# Altium PCB PCB1.PcbDoc
Units mm, origin at the board's own origin, x right, y up, seen from the top; angles counter-clockwise.
Board outline 152.4 x 101.6 mm, 2 copper layers (Top Layer, Bottom Layer); 8 components, 7 nets, 24 pads, 0 vias.
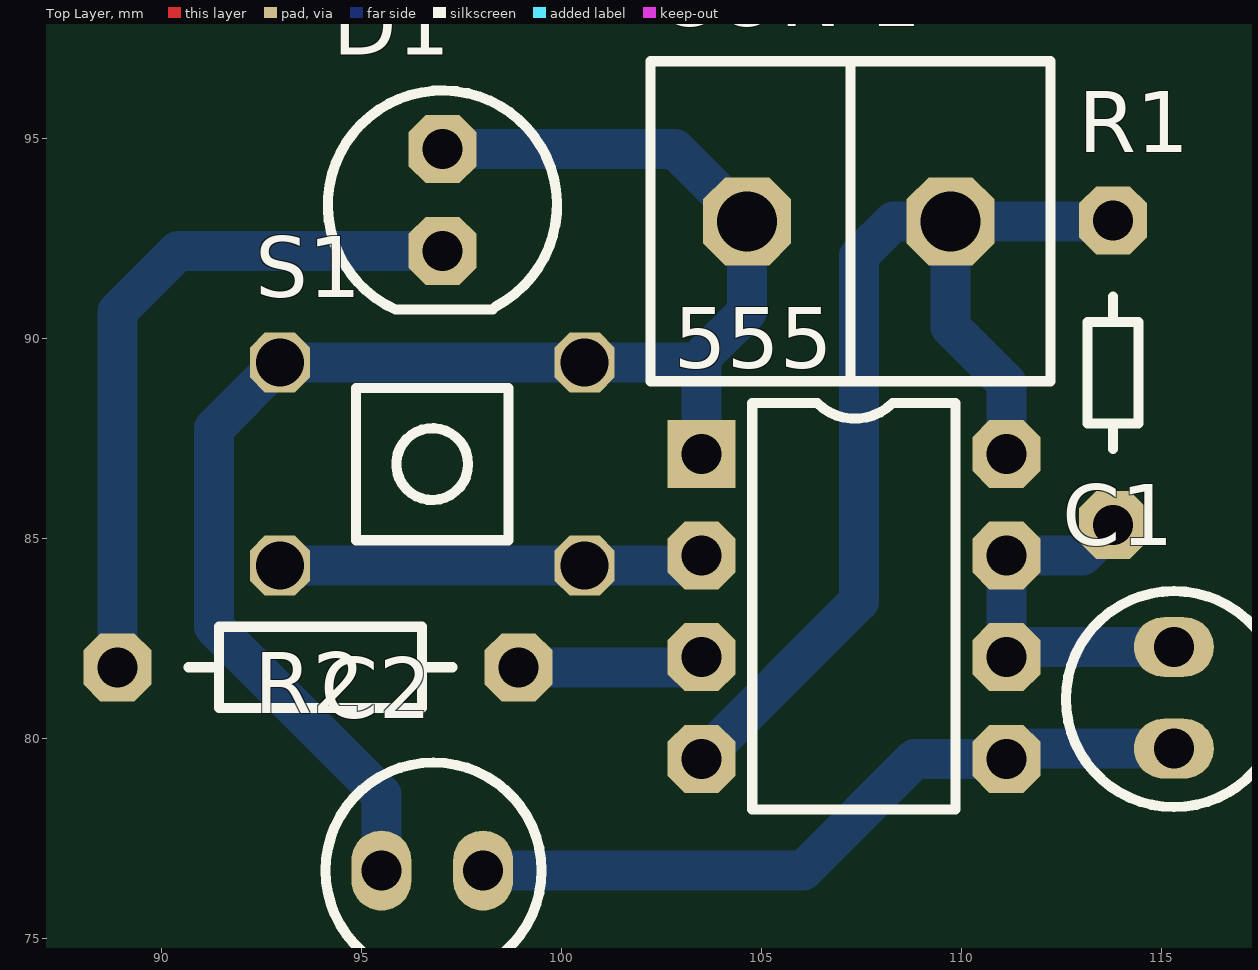
[diagram p0: Top Layer view]
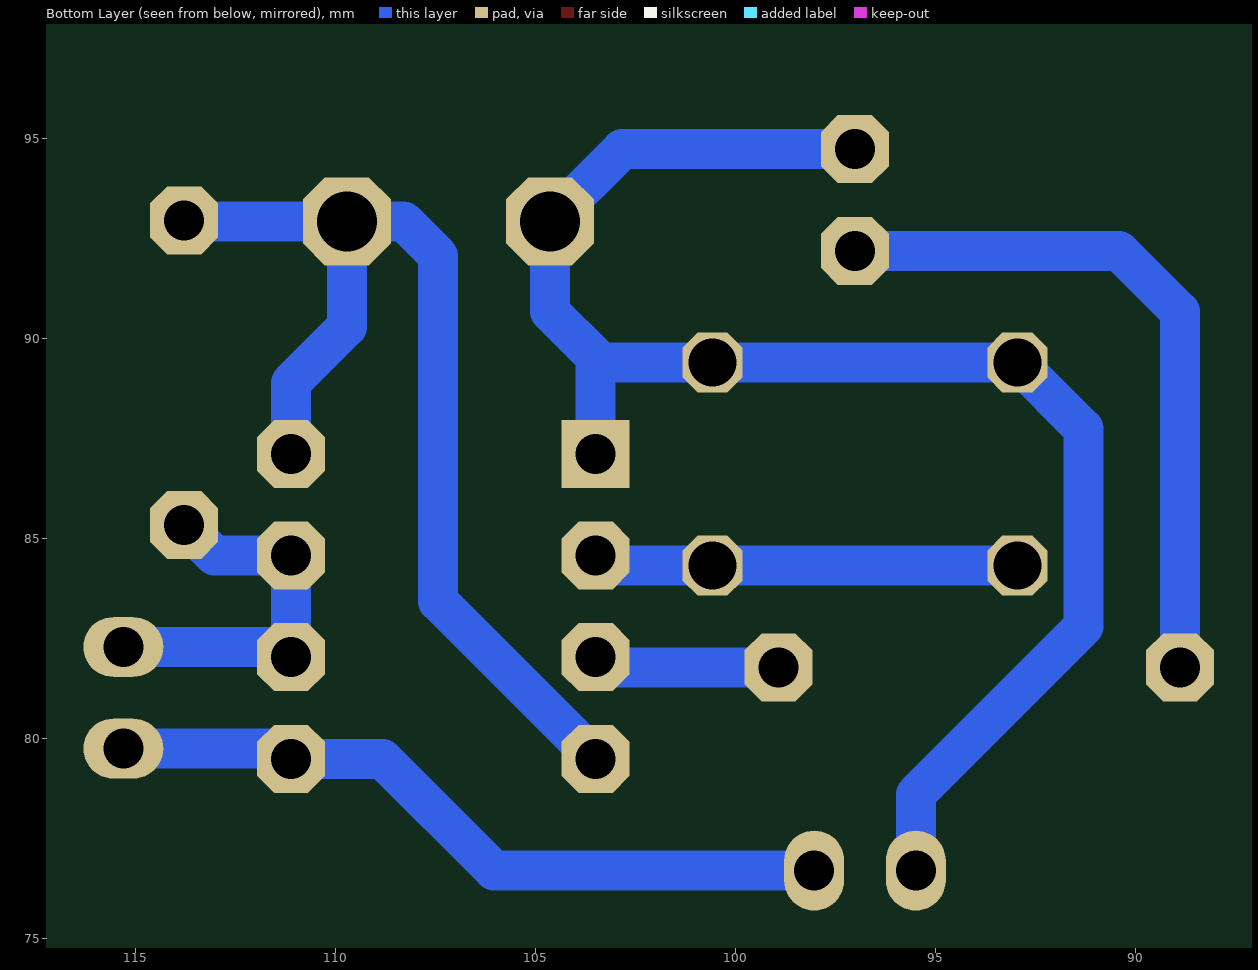
[diagram p1: Bottom Layer view, seen from below]

## Layer stack, top to bottom
Top Layer: signal copper 0.0356
Dielectric: dielectric 0.32, FR-4, Dk 4.8
Bottom Layer: signal copper 0.0356

## Board outline
25.4,25.4 177.8,25.4 177.8,127 25.4,127

## Design rules (kind name [scope] priority, off if disabled: settings)
Clearance [All] p1: gap=0.254
PolygonConnect [All] p1: connectstyle=Relief reliefconductorwidth=0.254 reliefentries=4 polygonreliefangle="90 Angle"
RoutingVias [All] p1: holewidth=0.711 width=1.27 viastyle="Through Hole" minholewidth=0.711 minwidth=1.27 maxholewidth=0.711 maxwidth=1.27
SilkscreenOverComponentPads [All] p1: minsilkscreentomaskgap=0.254
SolderMaskExpansion [All] p1: expansion=0.102
Width [All] p1: maxlimit=1 minlimit=1 preferedwidth=1
27 further rules are at their usual default settings.

## Components (designator, comment, footprint, x,y, rotation, side; value= is the part's Value field where it differs from the comment)
555 "dip-8pin" dip-8pin 103.505,87.122 r0 top
C1 "Cap" CAP 115.316,79.756 r90 top
C2 "Cap" CAP 98.044,76.708 r180 top
"CON 1" "Combicon 4pin" combicon-2pin_black 109.728,92.964 r270 top
D1 "LED-GREEN" LED-GREEN 97.028,93.472 r90 top
R1 "Resistor" res-2.54x4 113.792,85.344 r90 top
R2 "Resistor" res-2.54x5 88.9,81.788 r0 top
S1 "SW-PB" sw-pb 100.584,89.408 r270 top

## Footprints (in the part's own frame and the unit in brackets; to place one, negate y for a bottom-side part, rotate by r counter-clockwise, add the part's x,y. Pads: shape width x height; smd on the part's side, far side on the other; paste and mask are expansions set on the pad)
CAP [mm]
  oval 1.5x2 hole 1: 1(0,0) 2(2.54,0)
  silkscreen extent -1.46,-2.7 3.94,2.7, body extent -1.75,-3.04 4.32,3.04, height 7.01
combicon-2pin_black [mm]
  oct 2.2x2.2 hole 1.5: 1(0.025,0) 2(0.025,-5.08)
  silkscreen extent -3.97,-7.5 4.03,2.5, body extent -3.91,-7.51 3.98,2.41, height 12.9
dip-8pin [mm]
  rect 1.7x1.7 hole 1: 1(0,0)
  oct 1.7x1.7 hole 1: 2(0,-2.54) 3(0,-5.08) 4(0,-7.62) 5(7.62,-7.62) 6(7.62,-5.08) 7(7.62,-2.54) 8(7.62,0)
  silkscreen extent 1.27,-8.89 6.35,1.27, body extent -0.13,-8.89 7.75,1.27, height 2.51
LED-GREEN [mm]
  oct 1.7x1.7 hole 1: 1(-1.27,0) 2(1.27,0)
  silkscreen extent -2.74,-2.86 2.74,2.86, body extent -2.91,-2.67 2.67,2.92, height 9
res-2.54x4 [mm]
  oct 1.7x1.7 hole 1: 1(0,0) 2(7.62,0)
  silkscreen extent 1.91,-0.63 5.71,0.64, body extent -0.51,-1.1 8.11,1.11, height 3.1
res-2.54x5 [mm]
  oct 1.7x1.7 hole 1: 1(0,0) 2(10.033,0)
  silkscreen extent 1.78,-1.02 8.38,1.02, body extent -0.51,-1 10.53,1, height 3
sw-pb [mm]
  oct 1.5x1.5 hole 1.2: 1(0,0) 1(0,-7.62) 2(5.08,0) 2(5.08,-7.62)
  silkscreen extent 0.64,-5.71 4.45,-1.9, body extent -0.76,-8.38 5.84,0.76, height 5.5

## Part data
C1 C2: "Capacitor"
"CON 1": library part "Combicon - 2 pin_black"
D1: "Typical RED GaAs LED"
R1: library part "Resistor 2.54x4"
R2: library part "Resistor 2.54x5"
S1: "Switch"

## Nets (pads, with @x,y where several pads share a name; then routed paths per layer and width w, separated by ;. In a path a pad name is that pad's centre, name@x,y a point inside that pad or via, vN(x,y) a via of type N, cw(c..) or ccw(c..) an arc to the next point about the centre after c; other vN are vias at no path point)
+5: 555.4 555.8 "CON 1.1" R1.2 | length 27.3
  Bottom Layer w1: 555.4 107.442,83.439 107.442,92.075 108.306,92.939 109.728,92.939 ; 555.8 111.125,88.9 109.728,90.297 109.728,92.939 ; R1.2@113.767,92.939 109.728,92.939
GND: 555.1 "CON 1.2" C2.2 D1.2 S1.1 | length 40.6
  Bottom Layer w1: C2.2 95.504,78.613 91.313,82.804 91.313,87.757 92.964,89.408 100.584,89.408 103.378,89.408 ; D1.2 102.845,94.742 104.648,92.939 104.648,90.678 103.505,89.535 555.1 555.1@103.759,87.376
Net555_2: 555.2 S1.2 | length 10.6
  Bottom Layer w1: S1.2@92.964,84.328 100.584,84.328 103.251,84.328 555.2
Net555_3: 555.3 R2.2 | length 4.7
  Bottom Layer w1: R2.2 103.251,81.788 555.3
Net555_5: 555.5 C1.1 C2.1 | length 18.5
  Bottom Layer w1: C2.1 106.045,76.708 108.839,79.502 555.5 111.379,79.756 C1.1
Net555_6: 555.6 555.7 C1.2 R1.1 | length 9.8
  Bottom Layer w1: R1.1 113.03,84.582 555.7 555.6 111.379,82.296 C1.2
NetD1_1: D1.1 R2.1 | length 17.6
  Bottom Layer w1: R2.1 88.9,90.678 90.424,92.202 D1.1